# EAGLE board shd_v1.0_4 2 (EAGLE 9.5.2)
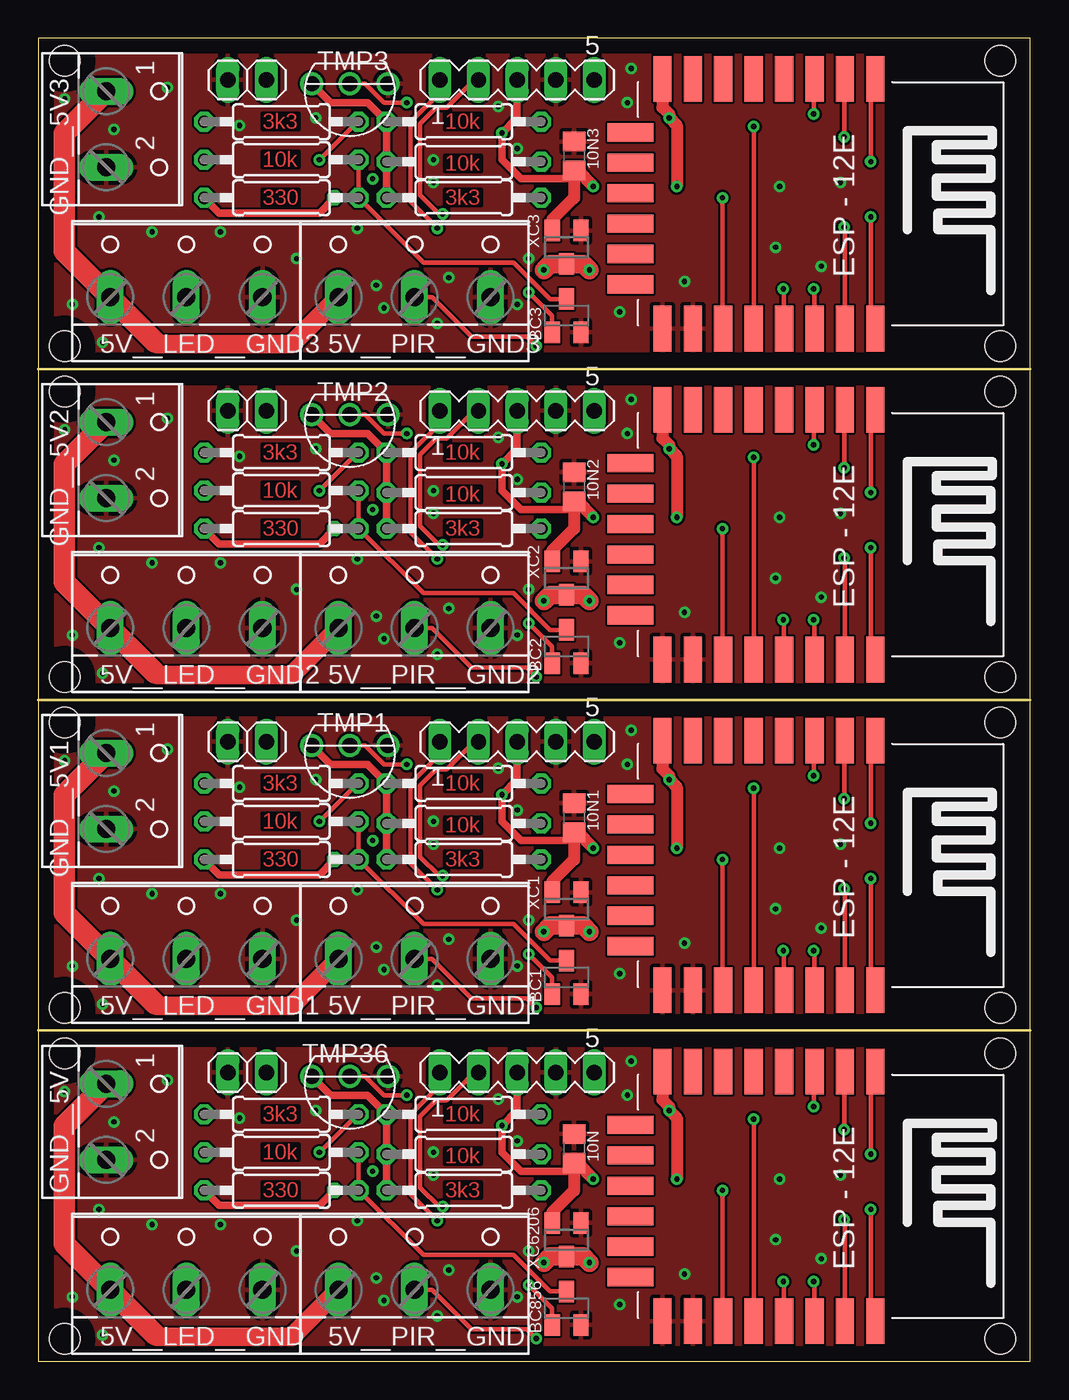
[diagram p0: board, top side]
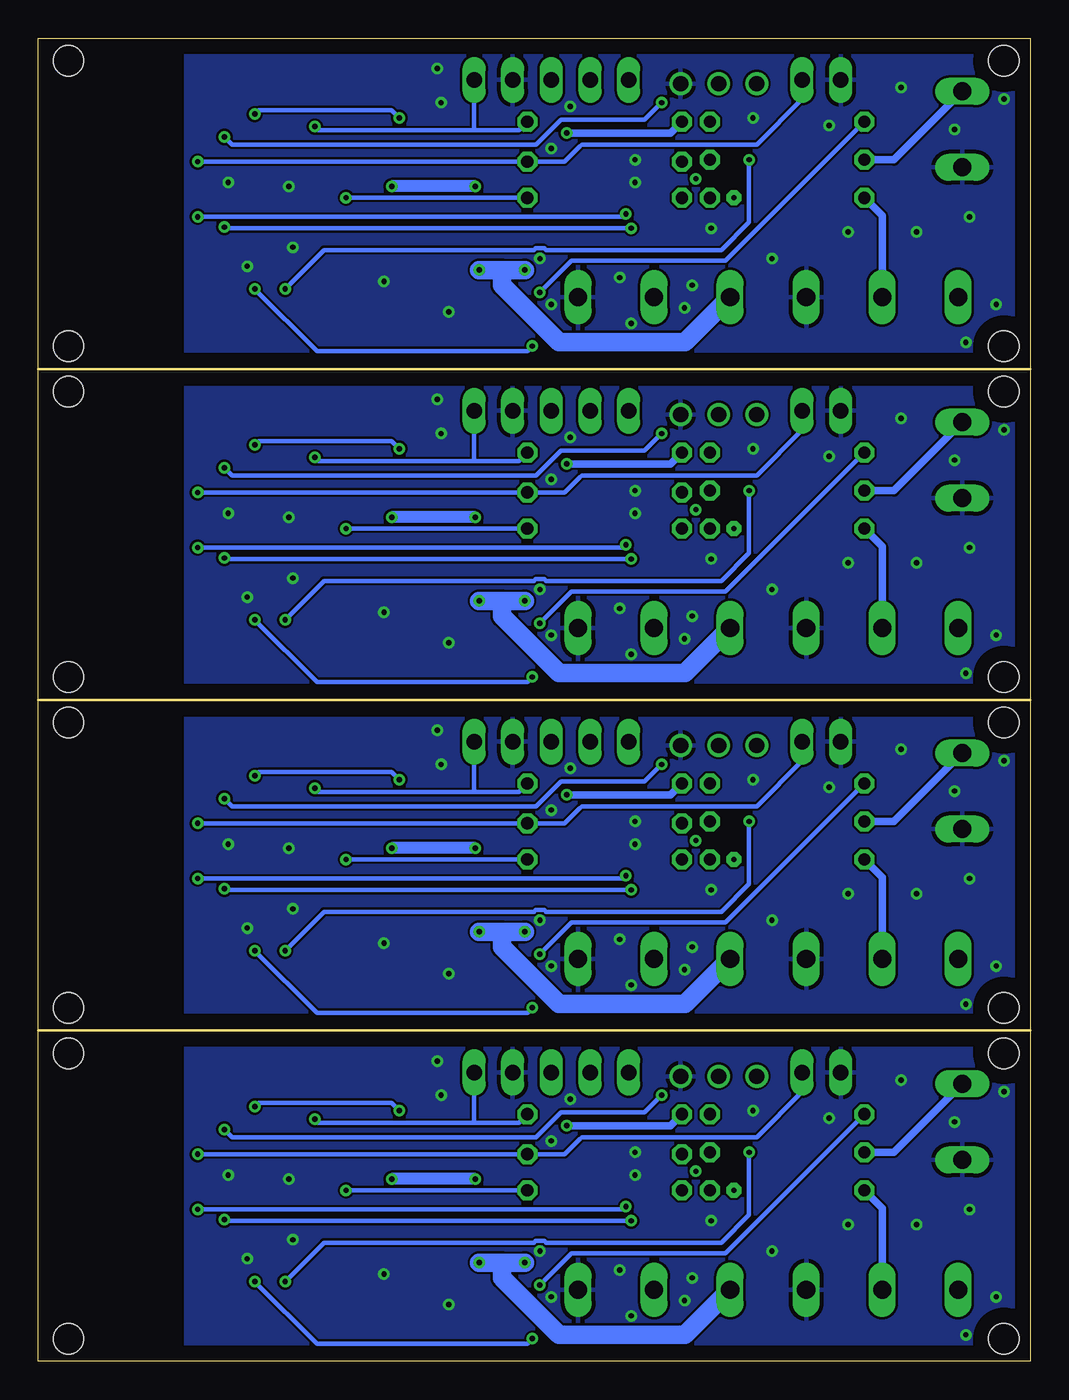
[diagram p1: board, bottom side, seen from below]

Size 65.25 x 87 mm. Coordinates in mm from the lower left corner, seen from the top.
Outline: 65.25,21.75 65.25,0 0,0 0,21.75
Outline: 65.25,21.75 65.25,43.5
Outline: 0,43.5 0,21.75
Outline: 65.25,43.5 65.25,65.25
Outline: 0,65.25 0,43.5
Outline: 65.25,65.25 65.25,87 0,87 0,65.25
Outline: 65.25,43.5 0,43.5
Outline: 0,21.75 65.25,21.75
Outline: 65.25,65.25 0,65.25
Copper layers (1*16): Top 0.035mm / dielectric 1.5mm / Bottom 0.035mm
Design rules "default *": minimum track width 0.3mm, minimum drill 0.35mm, track to track 6mil, track to pad 6mil, pad to pad 6mil, via to via 6mil, smd to smd 6mil, copper to edge 40mil, drill to drill 6mil, minimum pad ring 10mil, minimum via ring 8mil, stop-mask expansion 4mil, vias tented up to drill 0.31mm, thermal gap 10mil
Holes 2 mm at 1.75,20.25 63.25,20.25 63.25,1.5 1.75,1.5 1.75,42 63.25,42 63.25,23.25 1.75,23.25 1.75,63.75 63.25,63.75 63.25,45 1.75,45 1.75,85.5 63.25,85.5 63.25,66.75 1.75,66.75

## Footprints (pad centres in the part's own frame; a part is rotated, then mirrored left to right if it is on the bottom)
W237-103 = drill 1.194 long: 1 -5,-1.29; 2 0,-1.29; 3 5,-1.29
C0805 = smd 1.3 x 1.5: 1 -0.95,0; 2 0.95,0
SOT23-BEC = smd 1 x 1.4: B -0.95,-1.1; C 0,1.1; E 0.95,-1.1
W237-102 = drill 1.194 long: 1 -2.5,-1.27; 2 2.5,-1.27
1X02 = drill 1.016 long: 1 -1.27,0; 2 1.27,0
MA05-1 = drill 1.016 long: 1 -5.08,0; 2 -2.54,0; 3 0,0; 4 2.54,0; 5 5.08,0
0207/10 = drill 0.813 octagon: 1 -5.08,0; 2 5.08,0
TO-92 = drill 1: 1 -2.5,0; 2 0,0; 3 2.5,0
ESP12E-SMD = smd 3 x 1.2: ADC -8.3,3.8; CH_PD -8.3,1.8; GND 8.1,-8.2; GPIO0 8.1,-2.2; GPIO2 8.1,-4.2; GPIO4 8.1,-0.2; GPIO5 8.1,1.8; GPIO12 -8.3,-4.2; GPIO13 -8.3,-6.2; GPIO14 -8.3,-2.2; GPIO15 8.1,-6.2; GPIO16 -8.3,-0.2; RESET -8.3,5.8; RXD0 8.1,3.8; TXD0 8.1,5.8; VCC -8.3,-8.2 | smd 1.2 x 3: CS0 -4.8,-10.3; GPIO9 -0.8,-10.3; GPIO10 1.2,-10.3; MISO -2.8,-10.3; MOSI 3.2,-10.3; SCLK 5.2,-10.3
SOT23 = smd 1 x 1.4: 1 -0.95,-1.1; 2 0.95,-1.1; 3 0,1.1

## Placement (x,y rotation side)
5V__LED__GND  [W237-103]  9.75,6 0 top
5V__LED__GND1  [W237-103]  9.75,27.75 0 top
5V__LED__GND2  [W237-103]  9.75,49.5 0 top
5V__LED__GND3  [W237-103]  9.75,71.25 0 top
5V__PIR__GND  [W237-103]  24.75,6 0 top
5V__PIR__GND1  [W237-103]  24.75,27.75 0 top
5V__PIR__GND2  [W237-103]  24.75,49.5 0 top
5V__PIR__GND3  [W237-103]  24.75,71.25 0 top
10N  [C0805]  35.25,14 90 top
10N1  [C0805]  35.25,35.75 90 top
10N2  [C0805]  35.25,57.5 90 top
10N3  [C0805]  35.25,79.25 90 top
BC1  [SOT23-BEC]  34.75,25.25 0 top
BC2  [SOT23-BEC]  34.75,47 0 top
BC3  [SOT23-BEC]  34.75,68.75 0 top
BC856  [SOT23-BEC]  34.75,3.5 0 top
GND__5V  [W237-102]  5.75,15.75 270 top
GND__5V1  [W237-102]  5.75,37.5 270 top
GND__5V2  [W237-102]  5.75,59.25 270 top
GND__5V3  [W237-102]  5.75,81 270 top
JP1  [1X02]  13.75,19 0 top
JP2  [1X02]  13.75,40.75 0 top
JP3  [1X02]  13.75,62.5 0 top
JP4  [1X02]  13.75,84.25 0 top
PROG_INTERFACE  [MA05-1]  31.5,19 0 top
PROG_INTERFACE1  [MA05-1]  31.5,40.75 0 top
PROG_INTERFACE2  [MA05-1]  31.5,62.5 0 top
PROG_INTERFACE3  [MA05-1]  31.5,84.25 0 top
R_GPIO1  3k3  [0207/10]  28,33 0 top
R_GPIO2  3k3  [0207/10]  28,11.25 0 top
R_GPIO3  3k3  [0207/10]  28,54.75 0 top
R_GPIO4  3k3  [0207/10]  28,76.5 0 top
R_LED_B  3k3  [0207/10]  16,16.25 0 top
R_LED_B1  3k3  [0207/10]  16,38 0 top
R_LED_B2  3k3  [0207/10]  16,59.75 0 top
R_LED_B3  3k3  [0207/10]  16,81.5 0 top
R_LED_C  10k  [0207/10]  16,13.75 180 top
R_LED_C1  330  [0207/10]  16,11.25 0 top
R_LED_C2  10k  [0207/10]  16,35.5 180 top
R_LED_C3  330  [0207/10]  16,33 0 top
R_LED_C4  10k  [0207/10]  16,57.25 180 top
R_LED_C5  330  [0207/10]  16,54.75 0 top
R_LED_C6  10k  [0207/10]  16,79 180 top
R_LED_C7  330  [0207/10]  16,76.5 0 top
R_PROG  10k  [0207/10]  28,16.25 180 top
R_PROG1  10k  [0207/10]  28,38 180 top
R_PROG2  10k  [0207/10]  28,59.75 180 top
R_PROG3  10k  [0207/10]  28,81.5 180 top
R_RST  10k  [0207/10]  28,13.62 180 top
R_RST1  10k  [0207/10]  28,35.38 180 top
R_RST2  10k  [0207/10]  28,57.12 180 top
R_RST3  10k  [0207/10]  28,78.88 180 top
TMP1  TMP36  [TO-92]  20.5,40.5 180 top
TMP2  TMP36  [TO-92]  20.5,62.25 180 top
TMP3  TMP36  [TO-92]  20.5,84 180 top
TMP36  TMP36  [TO-92]  20.5,18.75 180 top
U1  [ESP12E-SMD]  49.25,10.75 270 top
U2  [ESP12E-SMD]  49.25,32.5 270 top
U3  [ESP12E-SMD]  49.25,54.25 270 top
U4  [ESP12E-SMD]  49.25,76 270 top
XC1  [SOT23]  34.75,29.75 180 top
XC2  [SOT23]  34.75,51.5 180 top
XC3  [SOT23]  34.75,73.25 180 top
XC6206  [SOT23]  34.75,8 180 top

## Library data of the parts
5V__LED__GND 5V__LED__GND1-5V__LED__GND3 5V__PIR__GND 5V__PIR__GND1-5V__PIR__GND3 = con-wago-500; MPN: 237-103; OC_FARNELL: unknown; OC_NEWARK: 18M7116
10N 10N1-10N3 = eagle-ltspice; SPICEMODEL: NONE; SPICEPREFIX: C
BC1-BC3 BC856 = transistor
GND__5V GND__5V1-GND__5V3 = con-wago-500; MPN: 237-102; OC_FARNELL: unknown; OC_NEWARK: 70K9898
JP1-JP4 = pinhead
PROG_INTERFACE PROG_INTERFACE1-PROG_INTERFACE3 = con-lstb; OC_FARNELL: unknown; OC_NEWARK: unknown
R_GPIO1-R_GPIO4 R_LED_B R_LED_B1-R_LED_B3 R_LED_C R_LED_C1-R_LED_C7 R_PROG R_PROG1-R_PROG3 R_RST R_RST1-R_RST3 = eagle-ltspice; SPICEMODEL: NONE; SPICEPREFIX: R
TMP1-TMP3 TMP36 = tmp36
U1-U4 = esp8266modules
XC1-XC3 XC6206 = Voltage Regulator

## Nets
GND: 5V__LED__GND.3 5V__PIR__GND.3 10N.2 BC856.E GND__5V.2 JP1.1 PROG_INTERFACE.4 TMP36.1 U1.GND U1.GPIO15 XC6206.1
GND1: 5V__LED__GND1.3 5V__PIR__GND1.3 10N1.2 BC1.E GND__5V1.2 JP2.1 PROG_INTERFACE1.4 TMP1.1 U2.GND U2.GPIO15 XC1.1
GND2: 5V__LED__GND2.3 5V__PIR__GND2.3 10N2.2 BC2.E GND__5V2.2 JP3.1 PROG_INTERFACE2.4 TMP2.1 U3.GND U3.GPIO15 XC2.1
GND3: 5V__LED__GND3.3 5V__PIR__GND3.3 10N3.2 BC3.E GND__5V3.2 JP4.1 PROG_INTERFACE3.4 TMP3.1 U4.GND U4.GPIO15 XC3.1
GPIO0: PROG_INTERFACE.5 R_PROG.1 U1.GPIO0
GPIO1: PROG_INTERFACE1.5 R_PROG1.1 U2.GPIO0
GPIO2: PROG_INTERFACE2.5 R_PROG2.1 U3.GPIO0
GPIO3: PROG_INTERFACE3.5 R_PROG3.1 U4.GPIO0
LED_DATA_3.1: R_LED_B1.2 U2.GPIO4
LED_DATA_3.2: R_LED_B2.2 U3.GPIO4
LED_DATA_3.3: R_LED_B.2 U1.GPIO4
LED_DATA_3.3_R: BC856.B R_LED_B.1
LED_DATA_3.3_R1: BC1.B R_LED_B1.1
LED_DATA_3.3_R2: BC2.B R_LED_B2.1
LED_DATA_3.3_R3: BC3.B R_LED_B3.1
LED_DATA_3.4: R_LED_B3.2 U4.GPIO4
LED_DATA_5.0: BC856.C R_LED_C1.2 R_LED_C.1
LED_DATA_5.1: BC1.C R_LED_C2.1 R_LED_C3.2
LED_DATA_5.2: BC2.C R_LED_C4.1 R_LED_C5.2
LED_DATA_5.3: BC3.C R_LED_C6.1 R_LED_C7.2
LED_DATA_OUT: 5V__LED__GND.2 R_LED_C1.1
LED_DATA_OUT1: 5V__LED__GND1.2 R_LED_C3.1
LED_DATA_OUT2: 5V__LED__GND2.2 R_LED_C5.1
LED_DATA_OUT3: 5V__LED__GND3.2 R_LED_C7.1
N$2: R_GPIO2.2 U1.GPIO2
N$3: R_GPIO1.2 U2.GPIO2
N$5: R_GPIO3.2 U3.GPIO2
N$7: R_GPIO4.2 U4.GPIO2
PIR: 5V__PIR__GND.2 U1.GPIO5
PIR1: 5V__PIR__GND1.2 U2.GPIO5
PIR2: 5V__PIR__GND2.2 U3.GPIO5
PIR3: 5V__PIR__GND3.2 U4.GPIO5
RST: JP1.2 R_RST.1 U1.RESET
RST1: JP2.2 R_RST1.1 U2.RESET
RST2: JP3.2 R_RST2.1 U3.RESET
RST3: JP4.2 R_RST3.1 U4.RESET
RX: PROG_INTERFACE.1 U1.RXD0
RX1: PROG_INTERFACE1.1 U2.RXD0
RX2: PROG_INTERFACE2.1 U3.RXD0
RX3: PROG_INTERFACE3.1 U4.RXD0
TX: PROG_INTERFACE.2 U1.TXD0
TX1: PROG_INTERFACE1.2 U2.TXD0
TX2: PROG_INTERFACE2.2 U3.TXD0
TX3: PROG_INTERFACE3.2 U4.TXD0
V_TMP: TMP36.2 U1.ADC
V_TMP1: TMP1.2 U2.ADC
V_TMP2: TMP2.2 U3.ADC
V_TMP3: TMP3.2 U4.ADC
VCC_5.0: 5V__LED__GND.1 5V__PIR__GND.1 GND__5V.1 R_LED_C.2 XC6206.3
VCC_5.1: 5V__LED__GND1.1 5V__PIR__GND1.1 GND__5V1.1 R_LED_C2.2 XC1.3
VCC_5.2: 5V__LED__GND2.1 5V__PIR__GND2.1 GND__5V2.1 R_LED_C4.2 XC2.3
VCC_5.3: 5V__LED__GND3.1 5V__PIR__GND3.1 GND__5V3.1 R_LED_C6.2 XC3.3
VDD_3.1: 10N1.1 PROG_INTERFACE1.3 R_GPIO1.1 R_PROG1.2 R_RST1.2 TMP1.3 U2.CH_PD U2.VCC XC1.2
VDD_3.2: 10N2.1 PROG_INTERFACE2.3 R_GPIO3.1 R_PROG2.2 R_RST2.2 TMP2.3 U3.CH_PD U3.VCC XC2.2
VDD_3.3: 10N.1 PROG_INTERFACE.3 R_GPIO2.1 R_PROG.2 R_RST.2 TMP36.3 U1.CH_PD U1.VCC XC6206.2
VDD_3.4: 10N3.1 PROG_INTERFACE3.3 R_GPIO4.1 R_PROG3.2 R_RST3.2 TMP3.3 U4.CH_PD U4.VCC XC3.2

## Tracks (layer width: path | path; a pad name or v marks a point on that pad's centre or on a via)
GND  (via drill 0.35)
  other vias: 2.25,4.25 4.25,1.75 7.5,9 4,10 5,15.75 8.5,18.5 12,9 17,7.25 22.25,5.5 22.75,4 27,6 26.25,3 38.25,3.75 42.5,5.75 48.5,8 51.5,6.75 52.75,12.25 48.75,12 38.75,17.5 39,19.75 26,13.75 13.25,16 26,12.25 21,9.25 18.25,16.5 32.25,7.25 31.5,14.5 1.75,17.75 30.25,17.25 31.5,4.25
  pour Top: -0.75,21.5 -0.75,0.25 55.5,0.25 55.5,21.5
  pour Bottom: -0.75,21.5 -0.75,0.25 55.5,0.25 55.5,21.5
GND1  (via drill 0.35)
  other vias: 2.25,26 4.25,23.5 7.5,30.75 4,31.75 5,37.5 8.5,40.25 12,30.75 17,29 22.25,27.25 22.75,25.75 27,27.75 26.25,24.75 38.25,25.5 42.5,27.5 48.5,29.75 51.5,28.5 52.75,34 48.75,33.75 38.75,39.25 39,41.5 26,35.5 13.25,37.75 26,34 21,31 18.25,38.25 32.25,29 31.5,36.25 1.75,39.5 30.25,39 31.5,26
  pour Top: -0.75,43.25 -0.75,22 55.5,22 55.5,43.25
  pour Bottom: -0.75,43.25 -0.75,22 55.5,22 55.5,43.25
GND2  (via drill 0.35)
  other vias: 2.25,47.75 4.25,45.25 7.5,52.5 4,53.5 5,59.25 8.5,62 12,52.5 17,50.75 22.25,49 22.75,47.5 27,49.5 26.25,46.5 38.25,47.25 42.5,49.25 48.5,51.5 51.5,50.25 52.75,55.75 48.75,55.5 38.75,61 39,63.25 26,57.25 13.25,59.5 26,55.75 21,52.75 18.25,60 32.25,50.75 31.5,58 1.75,61.25 30.25,60.75 31.5,47.75
  pour Top: -0.75,65 -0.75,43.75 55.5,43.75 55.5,65
  pour Bottom: -0.75,65 -0.75,43.75 55.5,43.75 55.5,65
GND3  (via drill 0.35)
  other vias: 2.25,69.5 4.25,67 7.5,74.25 4,75.25 5,81 8.5,83.75 12,74.25 17,72.5 22.25,70.75 22.75,69.25 27,71.25 26.25,68.25 38.25,69 42.5,71 48.5,73.25 51.5,72 52.75,77.5 48.75,77.25 38.75,82.75 39,85 26,79 13.25,81.25 26,77.5 21,74.5 18.25,81.75 32.25,72.5 31.5,79.75 1.75,83 30.25,82.5 31.5,69.5
  pour Top: -0.75,86.75 -0.75,65.5 55.5,65.5 55.5,86.75
  pour Bottom: -0.75,86.75 -0.75,65.5 55.5,65.5 55.5,86.75
GPIO0  (via drill 0.35)
  Top 0.3: U1.GPIO0 v47.05,15.93
  Bottom 0.3: v47.05,15.93 46.82,15.7 36.5,15.7 | R_PROG.1 33.63,15.7 36.5,15.7 | PROG_INTERFACE.5 36.58,15.78 36.5,15.7
GPIO1  (via drill 0.35)
  Top 0.3: U2.GPIO0 v47.05,37.68
  Bottom 0.3: v47.05,37.68 46.82,37.45 36.5,37.45 | R_PROG1.1 33.63,37.45 36.5,37.45 | PROG_INTERFACE1.5 36.58,37.53 36.5,37.45
GPIO2  (via drill 0.35)
  Top 0.3: U3.GPIO0 v47.05,59.43
  Bottom 0.3: v47.05,59.43 46.82,59.2 36.5,59.2 | R_PROG2.1 33.63,59.2 36.5,59.2 | PROG_INTERFACE2.5 36.58,59.28 36.5,59.2
GPIO3  (via drill 0.35)
  Top 0.3: U4.GPIO0 v47.05,81.18
  Bottom 0.3: v47.05,81.18 46.82,80.95 36.5,80.95 | R_PROG3.1 33.63,80.95 36.5,80.95 | PROG_INTERFACE3.5 36.58,81.03 36.5,80.95
LED_DATA_3.1  (via drill 0.35)
  Top 0.3: U2.GPIO4 49.05,26.95 v49,27 | R_LED_B1.2 21,38 v18.5,35.5
  Bottom 0.3: v49,27 46.44,29.56 32.66,29.56 32.53,29.68 31.97,29.68 31.84,29.56 20.33,29.56 18.5,31.38 v18.5,35.5
LED_DATA_3.2  (via drill 0.35)
  Top 0.3: U3.GPIO4 49.05,48.7 v49,48.75 | R_LED_B2.2 21,59.75 v18.5,57.25
  Bottom 0.3: v49,48.75 46.44,51.31 32.66,51.31 32.53,51.43 31.97,51.43 31.84,51.31 20.33,51.31 18.5,53.13 v18.5,57.25
LED_DATA_3.3  (via drill 0.35)
  Top 0.3: U1.GPIO4 49.05,5.2 v49,5.25 | R_LED_B.2 21,16.25 v18.5,13.75
  Bottom 0.3: v49,5.25 46.44,7.81 32.66,7.81 32.53,7.93 31.97,7.93 31.84,7.81 20.33,7.81 18.5,9.63 v18.5,13.75
LED_DATA_3.3_R  (via drill 0.35)
  Top 0.3: v32.27,5.02 33.8,3.49 BC856.B
  Bottom 0.3: R_LED_B.1 20.05,7.12 30.16,7.12 v32.27,5.02
LED_DATA_3.3_R1  (via drill 0.35)
  Top 0.3: v32.27,26.77 33.8,25.24 BC1.B
  Bottom 0.3: R_LED_B1.1 20.05,28.88 30.16,28.88 v32.27,26.77
LED_DATA_3.3_R2  (via drill 0.35)
  Top 0.3: v32.27,48.52 33.8,46.99 BC2.B
  Bottom 0.3: R_LED_B2.1 20.05,50.62 30.16,50.62 v32.27,48.52
LED_DATA_3.3_R3  (via drill 0.35)
  Top 0.3: v32.27,70.27 33.8,68.74 BC3.B
  Bottom 0.3: R_LED_B3.1 20.05,72.38 30.16,72.38 v32.27,70.27
LED_DATA_3.4  (via drill 0.35)
  Top 0.3: U4.GPIO4 49.05,70.45 v49,70.5 | R_LED_B3.2 21,81.5 v18.5,79
  Bottom 0.3: v49,70.5 46.44,73.06 32.66,73.06 32.53,73.18 31.97,73.18 31.84,73.06 20.33,73.06 18.5,74.88 v18.5,79
LED_DATA_5.0
  Top 0.3: R_LED_C.1 R_LED_C1.2 25.33,7 31.25,7 33.65,4.6 BC856.C
LED_DATA_5.1
  Top 0.3: R_LED_C2.1 R_LED_C3.2 25.33,28.75 31.25,28.75 33.65,26.35 BC1.C
LED_DATA_5.2
  Top 0.3: R_LED_C4.1 R_LED_C5.2 25.33,50.5 31.25,50.5 33.65,48.1 BC2.C
LED_DATA_5.3
  Top 0.3: R_LED_C6.1 R_LED_C7.2 25.33,72.25 31.25,72.25 33.65,69.85 BC3.C
LED_DATA_OUT  (via drill 0.35 pad 1)
  Top 0.5: R_LED_C1.1 11.92,10.25 18.5,10.25 v19.5,11.25
  Bottom 0.5: R_LED_C1.1 9.75,10.08 5V__LED__GND.2
LED_DATA_OUT1  (via drill 0.35 pad 1)
  Top 0.5: R_LED_C3.1 11.92,32 18.5,32 v19.5,33
  Bottom 0.5: R_LED_C3.1 9.75,31.83 5V__LED__GND1.2
LED_DATA_OUT2  (via drill 0.35 pad 1)
  Top 0.5: R_LED_C5.1 11.92,53.75 18.5,53.75 v19.5,54.75
  Bottom 0.5: R_LED_C5.1 9.75,53.58 5V__LED__GND2.2
LED_DATA_OUT3  (via drill 0.35 pad 1)
  Top 0.5: R_LED_C7.1 11.92,75.5 18.5,75.5 v19.5,76.5
  Bottom 0.5: R_LED_C7.1 9.75,75.33 5V__LED__GND3.2
N$1  (via drill 0.35)
  other vias: 22,12.5
N$2  (via drill 0.35)
  Top 0.3: U1.GPIO2 45,2.7 v45,11.25
  Bottom 0.3: R_GPIO2.2 v45,11.25
N$3  (via drill 0.35)
  Top 0.3: U2.GPIO2 45,24.45 v45,33
  Bottom 0.3: R_GPIO1.2 v45,33
N$4  (via drill 0.35)
  other vias: 22,34.25
N$5  (via drill 0.35)
  Top 0.3: U3.GPIO2 45,46.2 v45,54.75
  Bottom 0.3: R_GPIO3.2 v45,54.75
N$6  (via drill 0.35)
  other vias: 22,56
N$7  (via drill 0.35)
  Top 0.3: U4.GPIO2 45,67.95 v45,76.5
  Bottom 0.3: R_GPIO4.2 v45,76.5
N$8  (via drill 0.35)
  other vias: 22,77.75
PIR  (via drill 0.35)
  Top 0.3: v51,5.25 51.05,5.2 U1.GPIO5 | v32.75,1.5 32.15,2.1 28.5,2.1 25.89,4.71 5V__PIR__GND.2
  Bottom 0.3: v32.75,1.5 33.08,1.17 46.92,1.17 v51,5.25
PIR1  (via drill 0.35)
  Top 0.3: v51,27 51.05,26.95 U2.GPIO5 | v32.75,23.25 32.15,23.86 28.5,23.86 25.89,26.46 5V__PIR__GND1.2
  Bottom 0.3: v32.75,23.25 33.08,22.92 46.92,22.92 v51,27
PIR2  (via drill 0.35)
  Top 0.3: v51,48.75 51.05,48.7 U3.GPIO5 | v32.75,45 32.15,45.6 28.5,45.6 25.89,48.21 5V__PIR__GND2.2
  Bottom 0.3: v32.75,45 33.08,44.67 46.92,44.67 v51,48.75
PIR3  (via drill 0.35)
  Top 0.3: v51,70.5 51.05,70.45 U4.GPIO5 | v32.75,66.75 32.15,67.36 28.5,67.36 25.89,69.96 5V__PIR__GND3.2
  Bottom 0.3: v32.75,66.75 33.08,66.42 46.92,66.42 v51,70.5
RST  (via drill 0.35)
  Top 0.3: U1.RESET 54.75,18.75 v54.75,13.62
  Bottom 0.3: v54.75,13.62 R_RST.1 30.62,13.62 29.62,14.62 29.5,14.75 18,14.75 15.02,17.73 JP1.2
RST1  (via drill 0.35)
  Top 0.3: U2.RESET 54.75,40.5 v54.75,35.38
  Bottom 0.3: v54.75,35.38 R_RST1.1 30.62,35.38 29.62,36.38 29.5,36.5 18,36.5 15.02,39.48 JP2.2
RST2  (via drill 0.35)
  Top 0.3: U3.RESET 54.75,62.25 v54.75,57.12
  Bottom 0.3: v54.75,57.12 R_RST2.1 30.62,57.12 29.62,58.12 29.5,58.25 18,58.25 15.02,61.23 JP3.2
RST3  (via drill 0.35)
  Top 0.3: U4.RESET 54.75,84 v54.75,78.88
  Bottom 0.3: v54.75,78.88 R_RST3.1 30.62,78.88 29.62,79.88 29.5,80 18,80 15.02,82.98 JP4.2
RX  (via drill 0.35)
  Top 0.3: U1.RXD0 53.05,9.27 v53,9.32 | PROG_INTERFACE.1 26.42,18.17 24.5,16.25 24.5,11 v26.25,9.25
  Bottom 0.3: v26.25,9.25 52.93,9.25 v53,9.32
RX1  (via drill 0.35)
  Top 0.3: U2.RXD0 53.05,31.02 v53,31.07 | PROG_INTERFACE1.1 26.42,39.92 24.5,38 24.5,32.75 v26.25,31
  Bottom 0.3: v26.25,31 52.93,31 v53,31.07
RX2  (via drill 0.35)
  Top 0.3: U3.RXD0 53.05,52.77 v53,52.82 | PROG_INTERFACE2.1 26.42,61.67 24.5,59.75 24.5,54.5 v26.25,52.75
  Bottom 0.3: v26.25,52.75 52.93,52.75 v53,52.82
RX3  (via drill 0.35)
  Top 0.3: U4.RXD0 53.05,74.52 v53,74.57 | PROG_INTERFACE3.1 26.42,83.42 24.5,81.5 24.5,76.25 v26.25,74.5
  Bottom 0.3: v26.25,74.5 52.93,74.5 v53,74.57
TX  (via drill 0.35)
  Top 0.3: v26.6,10.19 26.35,10.19 25.12,11.41 25.12,16.12 26.16,17.16 26.84,17.16 28.69,19 PROG_INTERFACE.2 | U1.TXD0 54.75,2.95 v54.75,10
  Bottom 0.3: v26.6,10.19 26.6,10 v54.75,10
TX1  (via drill 0.35)
  Top 0.3: v26.6,31.93 26.35,31.93 25.12,33.16 25.12,37.87 26.16,38.91 26.84,38.91 28.69,40.75 PROG_INTERFACE1.2 | U2.TXD0 54.75,24.7 v54.75,31.75
  Bottom 0.3: v26.6,31.93 26.6,31.75 v54.75,31.75
TX2  (via drill 0.35)
  Top 0.3: v26.6,53.69 26.35,53.69 25.12,54.91 25.12,59.62 26.16,60.66 26.84,60.66 28.69,62.5 PROG_INTERFACE2.2 | U3.TXD0 54.75,46.45 v54.75,53.5
  Bottom 0.3: v26.6,53.69 26.6,53.5 v54.75,53.5
TX3  (via drill 0.35)
  Top 0.3: v26.6,75.44 26.35,75.44 25.12,76.66 25.12,81.37 26.16,82.41 26.84,82.41 28.69,84.25 PROG_INTERFACE3.2 | U4.TXD0 54.75,68.2 v54.75,75.25
  Bottom 0.3: v26.6,75.44 26.6,75.25 v54.75,75.25
V_TMP  (via drill 0.35)
  Top 0.3: v24.25,17.5 22.75,17.5 21.5,18.75 TMP36.2 | v53,15.25 53,19 U1.ADC
  Bottom 0.3: v53,15.25 52.5,14.75 32.5,14.75 30.88,16.38 25.38,16.38 v24.25,17.5
V_TMP1  (via drill 0.35)
  Top 0.3: v24.25,39.25 22.75,39.25 21.5,40.5 TMP1.2 | v53,37 53,40.75 U2.ADC
  Bottom 0.3: v53,37 52.5,36.5 32.5,36.5 30.88,38.12 25.38,38.12 v24.25,39.25
V_TMP2  (via drill 0.35)
  Top 0.3: v24.25,61 22.75,61 21.5,62.25 TMP2.2 | v53,58.75 53,62.5 U3.ADC
  Bottom 0.3: v53,58.75 52.5,58.25 32.5,58.25 30.88,59.88 25.38,59.88 v24.25,61
V_TMP3  (via drill 0.35)
  Top 0.3: v24.25,82.75 22.75,82.75 21.5,84 TMP3.2 | v53,80.5 53,84.25 U4.ADC
  Bottom 0.3: v53,80.5 52.5,80 32.5,80 30.88,81.62 25.38,81.62 v24.25,82.75
VCC_5.0  (via drill 0.35)
  Top 1.2: 7.71,1.75 7.84,1.62 16.66,1.62 5V__PIR__GND.1 | v36.25,6.5 35.85,6.9 XC6206.3 33.65,6.9 v33.25,6.5
  Top 1.4: GND__5V.1 1.72,15.49 1.72,7.74 5V__LED__GND.1 7.71,1.75
  Bottom 0.5: GND__5V.1 8.98,13.75 R_LED_C.2
  Bottom 1.2: 5V__PIR__GND.1 22.71,1.75 31,1.75 34.75,5.5 34.75,6.5 | 34.75,6.5 v36.25,6.5 | 34.75,6.5 v33.25,6.5
VCC_5.1  (via drill 0.35)
  Top 1.2: 7.71,23.5 7.84,23.37 16.66,23.37 5V__PIR__GND1.1 | v36.25,28.25 35.85,28.65 XC1.3 33.65,28.65 v33.25,28.25
  Top 1.4: GND__5V1.1 1.72,37.24 1.72,29.49 5V__LED__GND1.1 7.71,23.5
  Bottom 0.5: GND__5V1.1 8.98,35.5 R_LED_C2.2
  Bottom 1.2: 5V__PIR__GND1.1 22.71,23.5 31,23.5 34.75,27.25 34.75,28.25 | 34.75,28.25 v36.25,28.25 | 34.75,28.25 v33.25,28.25
VCC_5.2  (via drill 0.35)
  Top 1.2: 7.71,45.25 7.84,45.12 16.66,45.12 5V__PIR__GND2.1 | v36.25,50 35.85,50.4 XC2.3 33.65,50.4 v33.25,50
  Top 1.4: GND__5V2.1 1.72,58.99 1.72,51.24 5V__LED__GND2.1 7.71,45.25
  Bottom 0.5: GND__5V2.1 8.98,57.25 R_LED_C4.2
  Bottom 1.2: 5V__PIR__GND2.1 22.71,45.25 31,45.25 34.75,49 34.75,50 | 34.75,50 v36.25,50 | 34.75,50 v33.25,50
VCC_5.3  (via drill 0.35)
  Top 1.2: 7.71,67 7.84,66.87 16.66,66.87 5V__PIR__GND3.1 | v36.25,71.75 35.85,72.15 XC3.3 33.65,72.15 v33.25,71.75
  Top 1.4: GND__5V3.1 1.72,80.74 1.72,72.99 5V__LED__GND3.1 7.71,67
  Bottom 0.5: GND__5V3.1 8.98,79 R_LED_C6.2
  Bottom 1.2: 5V__PIR__GND3.1 22.71,67 31,67 34.75,70.75 34.75,71.75 | 34.75,71.75 v36.25,71.75 | 34.75,71.75 v33.25,71.75
VDD_3.1  (via drill 0.35)
  Top 0.3: v51,38.5 51,40.75 U2.CH_PD
  Top 0.5: U2.VCC 41.05,41.7 | TMP1.3 19.25,39.25 21.67,39.25 R_PROG1.2 R_RST1.2 R_GPIO1.1 | 10N1.1 34.7,34.25 31.75,34.25 30.5,35.5 v30.5,37.25 31.5,38.25 PROG_INTERFACE1.3
  Top 0.8: XC1.2 33.8,31.55 35.25,33 10N1.1 35.45,34.8 v36.5,33.75 | v42,33.75 42,37.75 v41.5,38.25 41.5,38.5 41.05,38.95 U2.VCC
  Bottom 0.3: v41.5,38.25 42,38.75 50.75,38.75 v51,38.5
  Bottom 0.5: R_PROG1.2 23.67,37.25 v30.5,37.25
  Bottom 0.8: v36.5,33.75 v42,33.75
VDD_3.2  (via drill 0.35)
  Top 0.3: v51,60.25 51,62.5 U3.CH_PD
  Top 0.5: U3.VCC 41.05,63.45 | TMP2.3 19.25,61 21.67,61 R_PROG2.2 R_RST2.2 R_GPIO3.1 | 10N2.1 34.7,56 31.75,56 30.5,57.25 v30.5,59 31.5,60 PROG_INTERFACE2.3
  Top 0.8: XC2.2 33.8,53.3 35.25,54.75 10N2.1 35.45,56.55 v36.5,55.5 | v42,55.5 42,59.5 v41.5,60 41.5,60.25 41.05,60.7 U3.VCC
  Bottom 0.3: v41.5,60 42,60.5 50.75,60.5 v51,60.25
  Bottom 0.5: R_PROG2.2 23.67,59 v30.5,59
  Bottom 0.8: v36.5,55.5 v42,55.5
VDD_3.3  (via drill 0.35)
  Top 0.3: v51,16.75 51,19 U1.CH_PD
  Top 0.5: U1.VCC 41.05,19.95 | TMP36.3 19.25,17.5 21.67,17.5 R_PROG.2 R_RST.2 R_GPIO2.1 | 10N.1 34.7,12.5 31.75,12.5 30.5,13.75 v30.5,15.5 31.5,16.5 PROG_INTERFACE.3
  Top 0.8: XC6206.2 33.8,9.8 35.25,11.25 10N.1 35.45,13.05 v36.5,12 | v42,12 42,16 v41.5,16.5 41.5,16.75 41.05,17.2 U1.VCC
  Bottom 0.3: v41.5,16.5 42,17 50.75,17 v51,16.75
  Bottom 0.5: R_PROG.2 23.67,15.5 v30.5,15.5
  Bottom 0.8: v36.5,12 v42,12
VDD_3.4  (via drill 0.35)
  Top 0.3: v51,82 51,84.25 U4.CH_PD
  Top 0.5: U4.VCC 41.05,85.2 | TMP3.3 19.25,82.75 21.67,82.75 R_PROG3.2 R_RST3.2 R_GPIO4.1 | 10N3.1 34.7,77.75 31.75,77.75 30.5,79 v30.5,80.75 31.5,81.75 PROG_INTERFACE3.3
  Top 0.8: XC3.2 33.8,75.05 35.25,76.5 10N3.1 35.45,78.3 v36.5,77.25 | v42,77.25 42,81.25 v41.5,81.75 41.5,82 41.05,82.45 U4.VCC
  Bottom 0.3: v41.5,81.75 42,82.25 50.75,82.25 v51,82
  Bottom 0.5: R_PROG3.2 23.67,80.75 v30.5,80.75
  Bottom 0.8: v36.5,77.25 v42,77.25

## Text on the board
Top: 3k3 | 10k | 10k | 10k | 330 | 3k3 | 3k3 | 10k | 10k | 10k | 330 | 3k3 | 3k3 | 10k | 10k | 10k | 330 | 3k3 | 3k3 | 10k | 10k | 10k | 330 | 3k3